# EAGLE board POV-old (EAGLE 6.5.0)
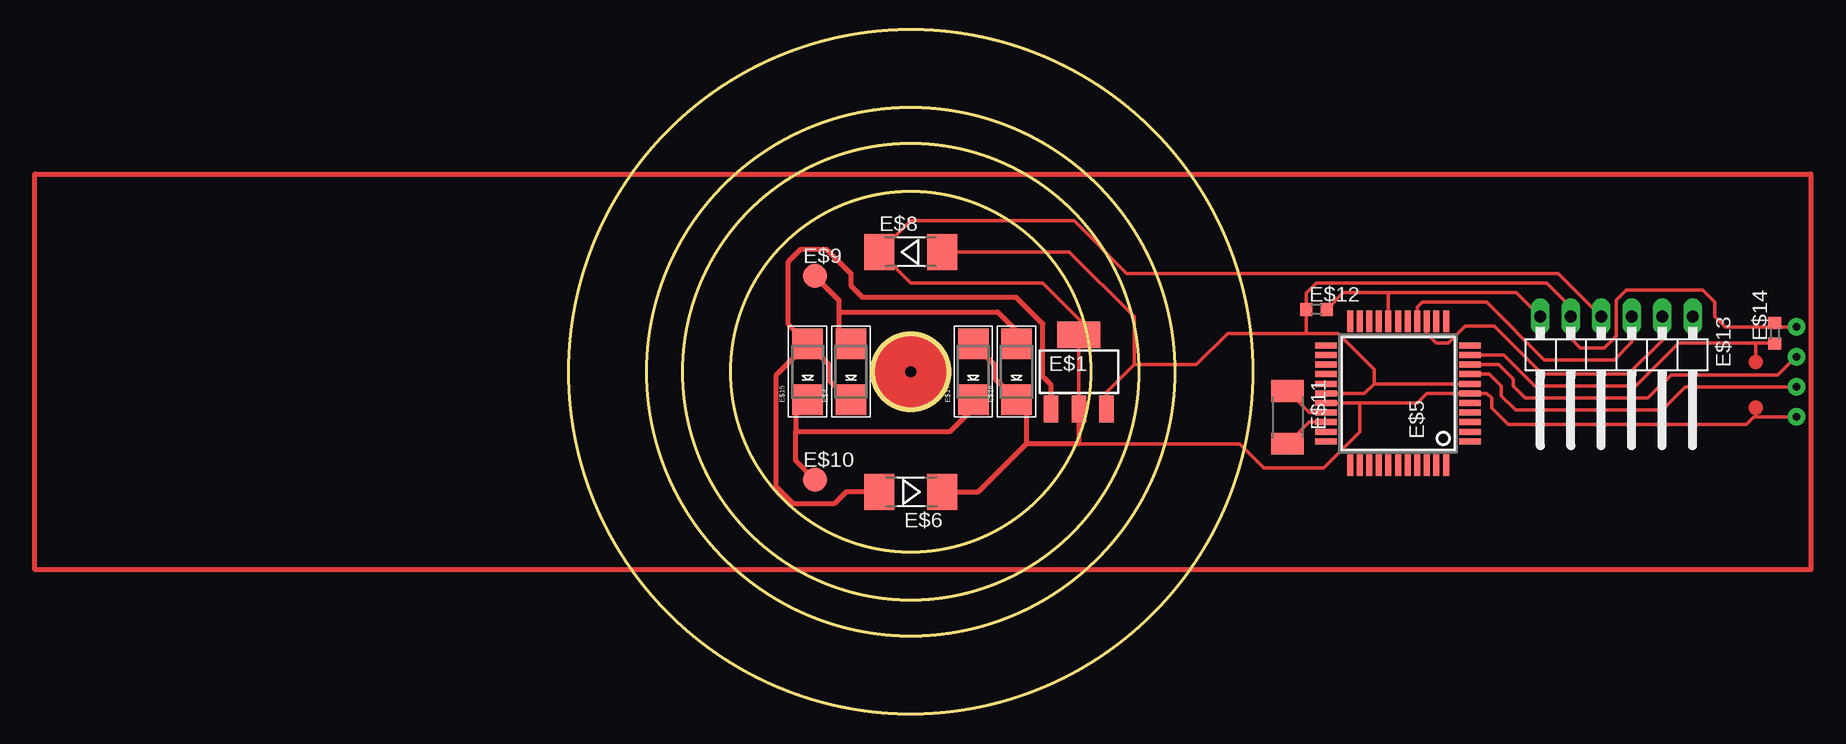
[diagram p0: board, top side]

Size 57 x 57 mm. Coordinates in mm from the lower left corner, seen from the top.
Outline: circle at 28.5,28.5 radius 3.16
Outline: circle at 28.5,28.5 radius 15
Outline: circle at 28.5,28.5 radius 22
Outline: circle at 28.5,28.5 radius 19
Outline: circle at 28.5,28.5 radius 28.5
Copper layers (1*16): Top 0.035mm / dielectric 1.5mm / Bottom 0.035mm
Design rules "default": minimum track width 10mil, minimum drill 24mil, track to track 8mil, track to pad 8mil, pad to pad 8mil, via to via 8mil, smd to smd 8mil, copper to edge 40mil, drill to drill 8mil, minimum pad ring 10mil, minimum via ring 8mil, stop-mask expansion 4mil, vias tented up to drill 0mil, thermal gap 10mil

## Footprints (pad centres in the part's own frame; a part is rotated, then mirrored left to right if it is on the bottom)
SOT223 = smd 1.219 x 2.235: 1 -2.311,-3.099; 2 0,-3.099; 3 2.311,-3.099 | smd 3.6 x 2.2: 4 0,3.099
SMADIODE = smd 2.54 x 2.54: A 2.349,0; C -2.349,0
SQFP-S-10X10-44 = smd 0.5 x 1.8: 1 -4,-6; 2 -3.2,-6; 3 -2.4,-6; 4 -1.6,-6; 5 -0.8,-6; 6 0,-6; 7 0.8,-6; 8 1.6,-6; 9 2.4,-6; 10 3.2,-6; 11 4,-6; 23 4,6; 24 3.2,6; 25 2.4,6; 26 1.6,6; 27 0.8,6; 28 0,6; 29 -0.8,6; 30 -1.6,6; 31 -2.4,6; 32 -3.2,6; 33 -4,6 | smd 1.8 x 0.5: 12 6,-4; 13 6,-3.2; 14 6,-2.4; 15 6,-1.6; 16 6,-0.8; 17 6,0; 18 6,0.8; 19 6,1.6; 20 6,2.4; 21 6,3.2; 22 6,4; 34 -6,4; 35 -6,3.2; 36 -6,2.4; 37 -6,1.6; 38 -6,0.8; 39 -6,0; 40 -6,-0.8; 41 -6,-1.6; 42 -6,-2.4; 43 -6,-3.2; 44 -6,-4
MELF-MLL41 = smd 2.5 x 3: A 2.625,0; C -2.625,0
TP20R = smd 2 x 2: TP 0,0
R2010 = smd 1.8 x 2.7: 1 -2.2,0; 2 2.2,0
R0603 = smd 1 x 1.1: 1 -0.85,0; 2 0.85,0
1X06/90 = drill 1.016 long: 1 -6.35,-3.81; 2 -3.81,-3.81; 3 -1.27,-3.81; 4 1.27,-3.81; 5 3.81,-3.81; 6 6.35,-3.81

## Placement (x,y rotation side)
E$1  [SOT223]  42.5,28.5 0 top
E$4  [SMADIODE]  23.5,28.5 90 top
E$5  [SQFP-S-10X10-44]  69.1,26.7 90 top  (outside the outline)
E$6  [MELF-MLL41]  28.5,18.5 180 top
E$8  [MELF-MLL41]  28.5,38.5 0 top
E$9  [TP20R]  20.5,36.5 0 top
E$10  [TP20R]  20.5,19.5 0 top
E$11  [R2010]  59.9,24.7 270 top
E$12  [R0603]  62.3,33.7 0 top  (outside the outline)
E$13  [1X06/90]  87.3,29.3 180 top  (outside the outline)
E$14  [R0603]  100.5,31.7 90 top  (outside the outline)
E$15  [SMADIODE]  19.9,28.5 90 top
E$16  [SMADIODE]  37.3,28.5 90 top
E$17  [SMADIODE]  33.7,28.5 90 top

## Library data of the parts
E$1 E$5 E$11 E$12 E$14 = smd-ipc
E$4 E$15-E$17 = adafruit
E$6 E$8 = diode
E$9 E$10 = testpad
E$13 = pinhead

## Nets
S$1: E$5.18 E$12.2 E$13.6
S$2: E$1.2 E$1.4 E$5.6 E$5.29 E$6.C E$8.C E$13.4
S$3: E$10.TP
S$4: E$9.TP
S$5: E$1.1 E$4.C E$6.A E$15.A
S$7: E$5.15 E$13.3
S$8: E$5.30 E$11.1
S$9: E$5.31 E$11.2
S$10: E$5.14 E$13.2
S$11: E$5.8
S$12: E$1.3 E$5.7 E$5.28 E$8.A E$12.1 E$13.5
S$18: E$5.9
S$19: E$16.C E$17.A

## Tracks (layer width: path | path; a pad name or v marks a point on that pad's centre or on a via)
S$1
  Top 0.305: E$13.6 78.96,35.1 68.3,35.1 | 68.3,35.1 E$5.18 | E$12.2 64.55,35.1 68.3,35.1
S$2
  Top 0.305: 65.9,25.9 70.7,25.9 71.5,26.7 E$5.6 76.5,26.7 76.9,26.3 76.9,25.5 78.3,24.1 98.1,24.1 98.75,24.75 98.9,24.75 | 65.9,25.9 E$5.29 | 42.5,22.5 55.9,22.5 57.9,20.5 62.9,20.5 65.9,23.5 65.9,25.9 | E$13.4 82.44,36.7 46.5,36.7 42.1,41.1 28.48,41.1 E$8.C 28.48,35.9 39.5,35.9 43.3,32.1 E$1.4 E$1.2 | 98.9,24.75 102.25,24.75 | 98.9,24.75 98.9,25.5
  Top 0.406: E$1.2 42.5,22.5 38.1,22.5 | 38.1,26.5 38.1,22.5 | E$6.C 34.1,18.5 38.1,22.5
S$3
  Top 0.406: E$10.TP 18.9,21.1 18.9,23.5 | 18.9,23.5 31.73,23.5 34.1,25.88 | 18.9,25.88 18.9,23.5
S$4
  Top 0.406: 22.5,33.5 35.73,33.5 38.1,31.12 | E$9.TP 22.5,34.5 22.5,33.5 | 22.5,33.5 22.5,31.52 22.9,31.12
S$5
  Top 0.406: E$15.A 21.7,29.05 21.7,27.75 E$4.C | E$6.A 23.1,18.5 22.1,17.5 18.7,17.5 17.3,18.9 17.3,28.25 E$15.A | E$15.A 18.3,32.45 18.3,37.7 19.3,38.7 21.5,38.7 23.5,36.7 23.5,35.7 24.5,34.7 37.3,34.7 39.5,32.5 39.5,28.1 40.19,27.41 E$1.1
S$7
  Top 0.305: E$5.15 70.7,33.9 71.1,34.3 76.5,34.3 81.3,29.5 87.1,29.5 88.57,30.97 E$13.3
  Top 0.406: 70.7,33.1 E$5.15
S$8
  Top 0.305: E$5.30 61.7,25.1 E$11.1
S$9
  Top 0.305: E$5.31 61.7,24.3 E$11.2
S$10
  Top 0.305: E$13.2 91.11,31.11 88.3,28.3 81.1,28.3 77.1,32.3 74.7,32.3 73.3,30.9 72.3,30.9 71.5,31.7 E$5.14
S$11  (via drill 0.6 pad 1.42)
  Top 0.305: E$5.8 76.7,28.3 77.7,27.3 77.7,26.5 78.9,25.3 91.1,25.3 93.05,27.25 v102.3,27.25
S$12  (via drill 0.6 pad 1.42)
  Top 0.305: v102.3,32.25 96.35,32.25 95.5,33.1 95.5,34.3 94.5,35.3 88.1,35.3 87.3,34.5 87.3,31.5 86.3,30.5 84.3,30.5 83.49,31.31 E$13.5 83.49,33.91 81.5,35.9 62.3,35.9 61.45,35.05 E$12.1 61.45,31.7 | E$5.7 67.1,27.5 | 67.1,27.5 66.3,26.7 E$5.28 | 67.1,27.5 67.1,28.7 64.1,31.7 61.45,31.7 | 61.45,31.7 54.9,31.7 52.3,29.1 47.1,29.1 | 47.1,29.1 44.81,26.81 E$1.3 | E$8.A 41.7,38.5 47.1,33.1 47.1,29.1
S$13
  Top 0.305: 100.5,30.9 98.9,30.9 | 98.9,30.9 92.5,30.9 88.9,27.3 80.5,27.3 77.9,29.9 75.1,29.9 | 98.9,29.3 98.9,30.9
S$14  (via drill 0.6 pad 1.42)
  other vias: 102.3,24.75
S$15
  Top 0.305: 100.5,32.3 100.5,32.7
S$16
  Top 0.406: -44.5,12 -44.5,45 103.5,45 103.5,12 -44.5,12
S$17  (via drill 0.6 pad 1.42)
  other vias: 102.3,29.75
S$18
  Top 0.305: 102.25,29.75 100.75,28.25 91.85,28.25 89.9,26.3 79.7,26.3 78.7,27.3 78.7,27.9 77.5,29.1 E$5.9
S$19
  Top 0.406: E$17.A 35.5,29.05 35.5,27.95 E$16.C
S$20
  Top 0.406: 34.1,31.12 34.1,30.5
S$21
  Top 0.406: 22.9,26.5 22.9,25.88
(copper drawn outside any net)
  shapes: Top circle x3